# Altium PCB Base.PcbDoc
Units mm, origin at the board's own origin, x right, y up, seen from the top; angles counter-clockwise.
Board outline 79.4 x 68 mm, 4 copper layers (Top Layer, Plane 1, Plane 2, Bottom Layer), stack 1.579 mm thick; 69 components, 49 nets, 246 pads, 29 vias.
Unrouted connection lines stored in the file: 49.
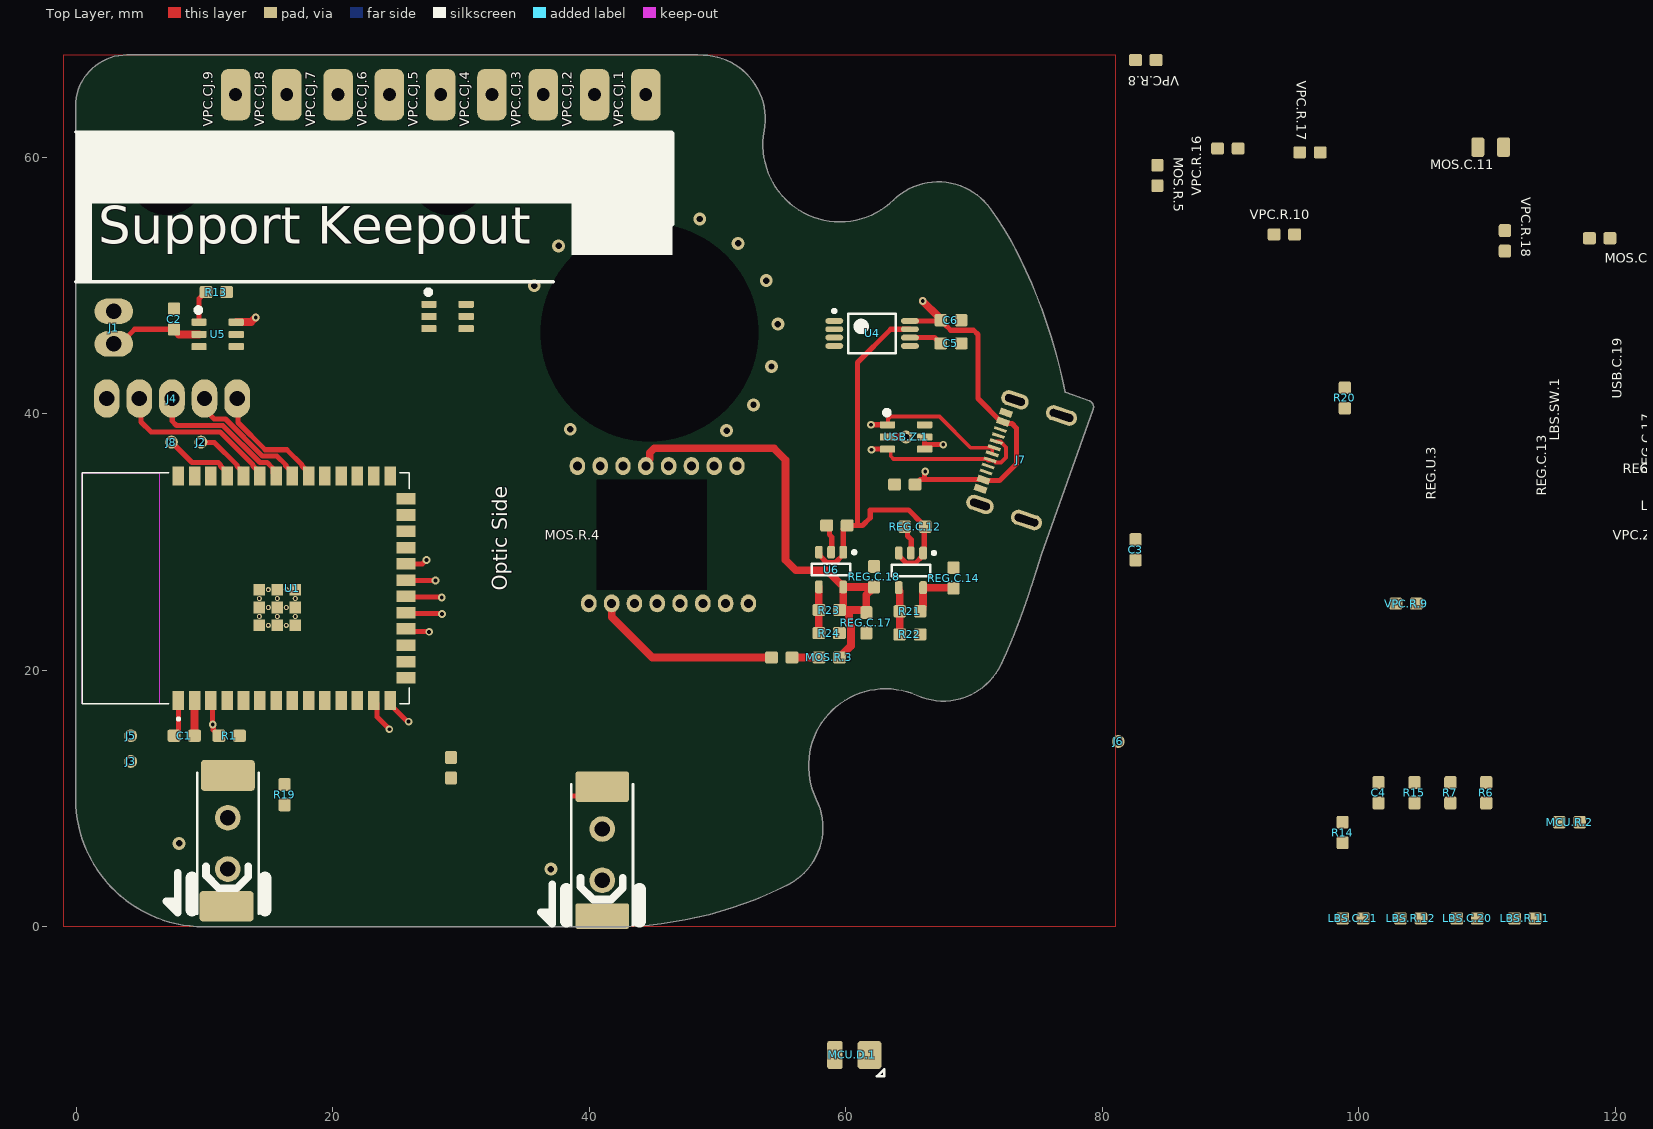
[diagram p0: Top Layer view]
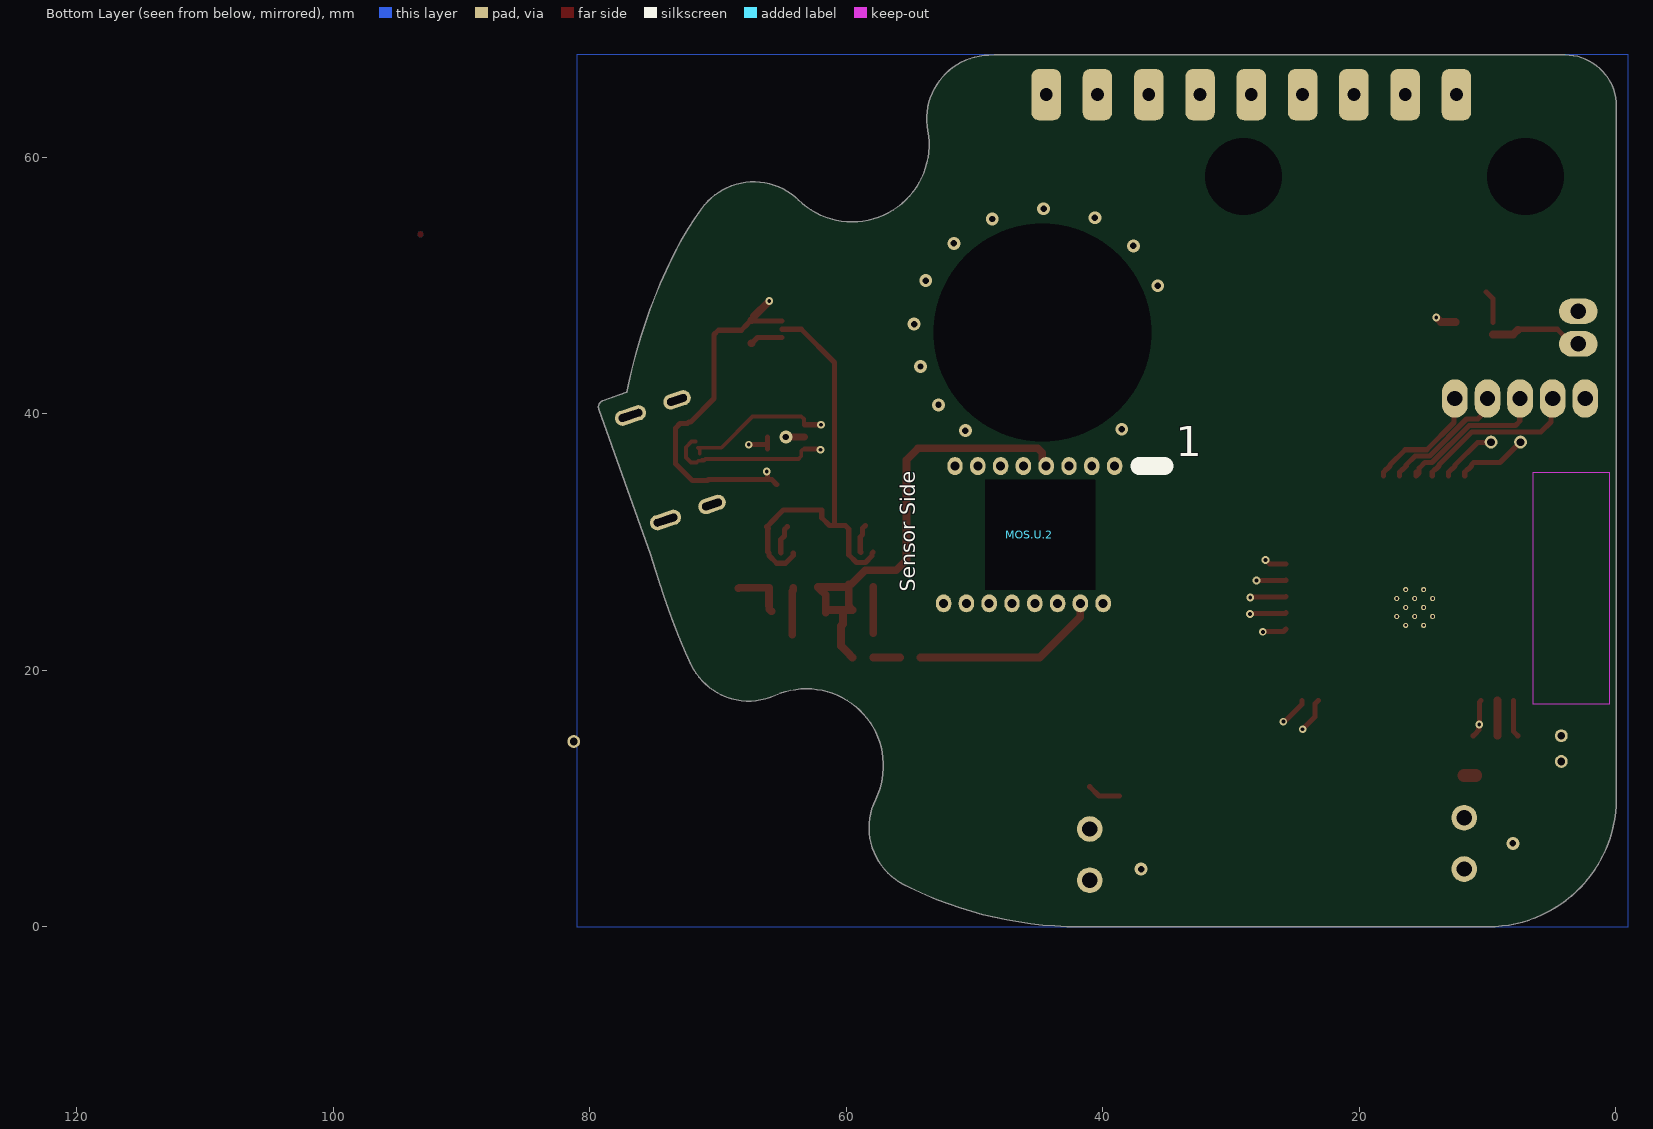
[diagram p1: Bottom Layer view, seen from below]
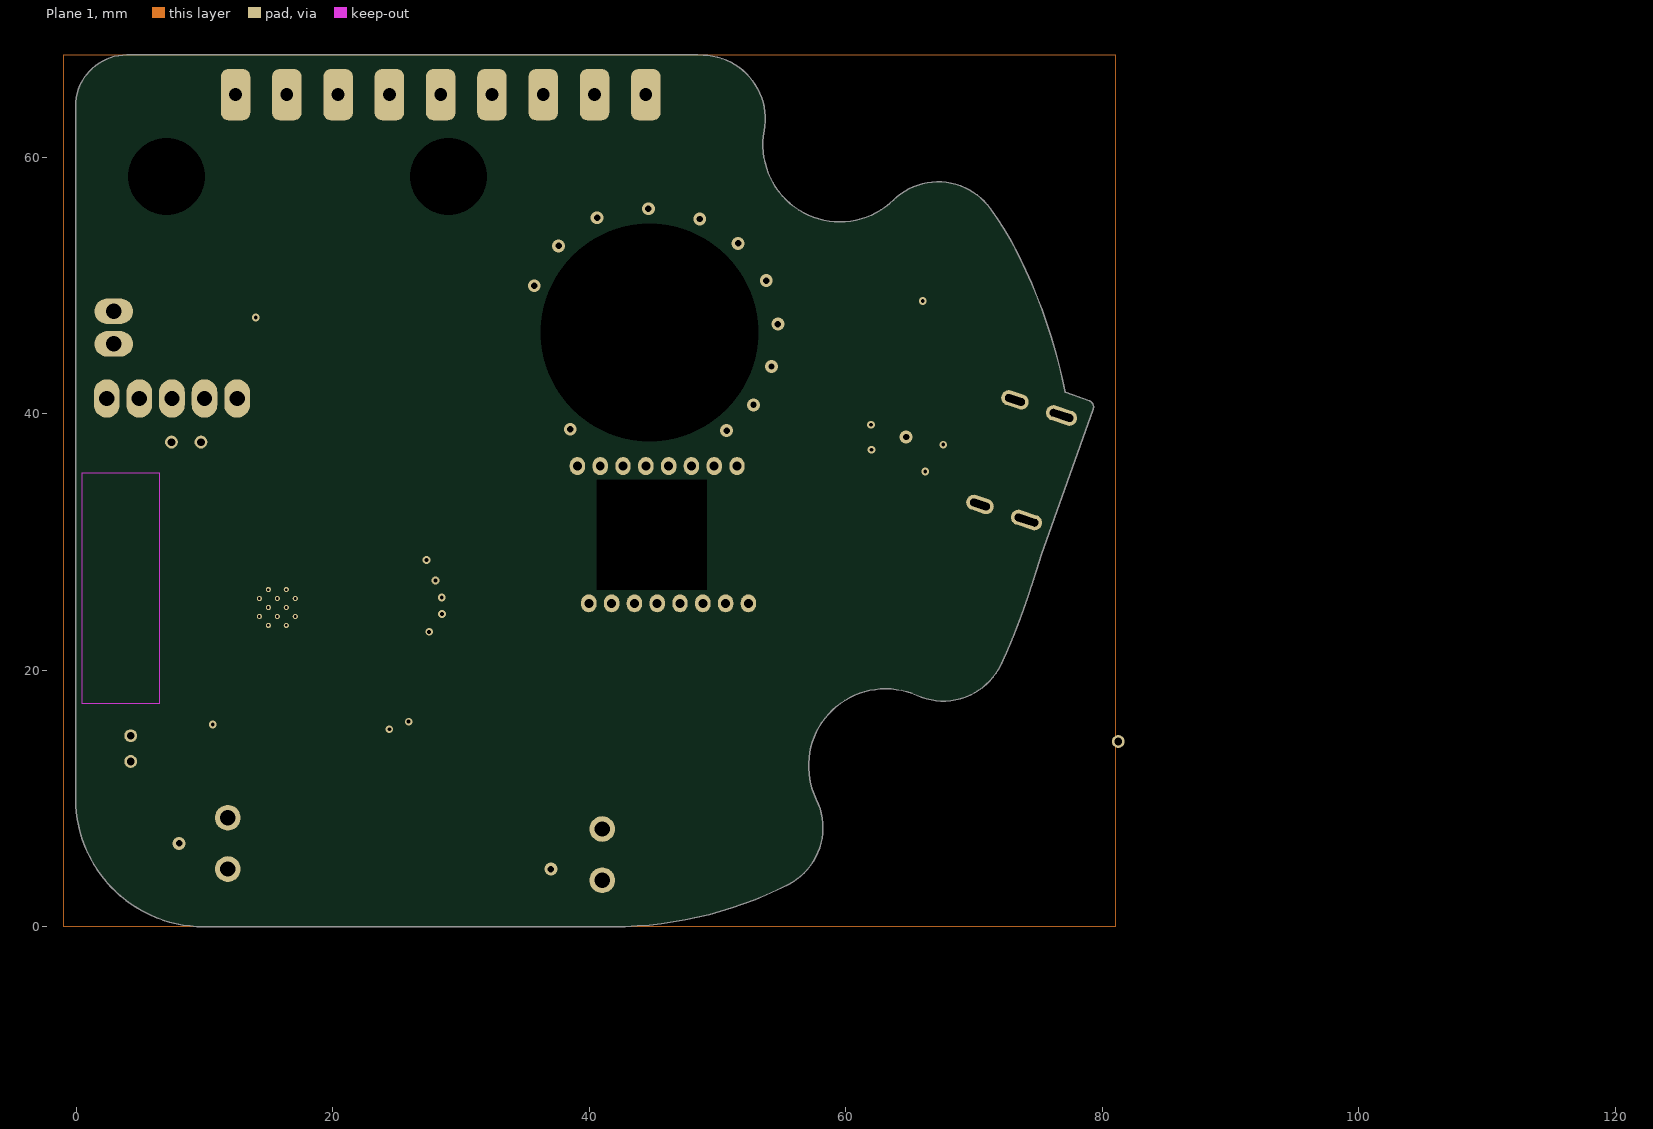
[diagram p2: Plane 1]
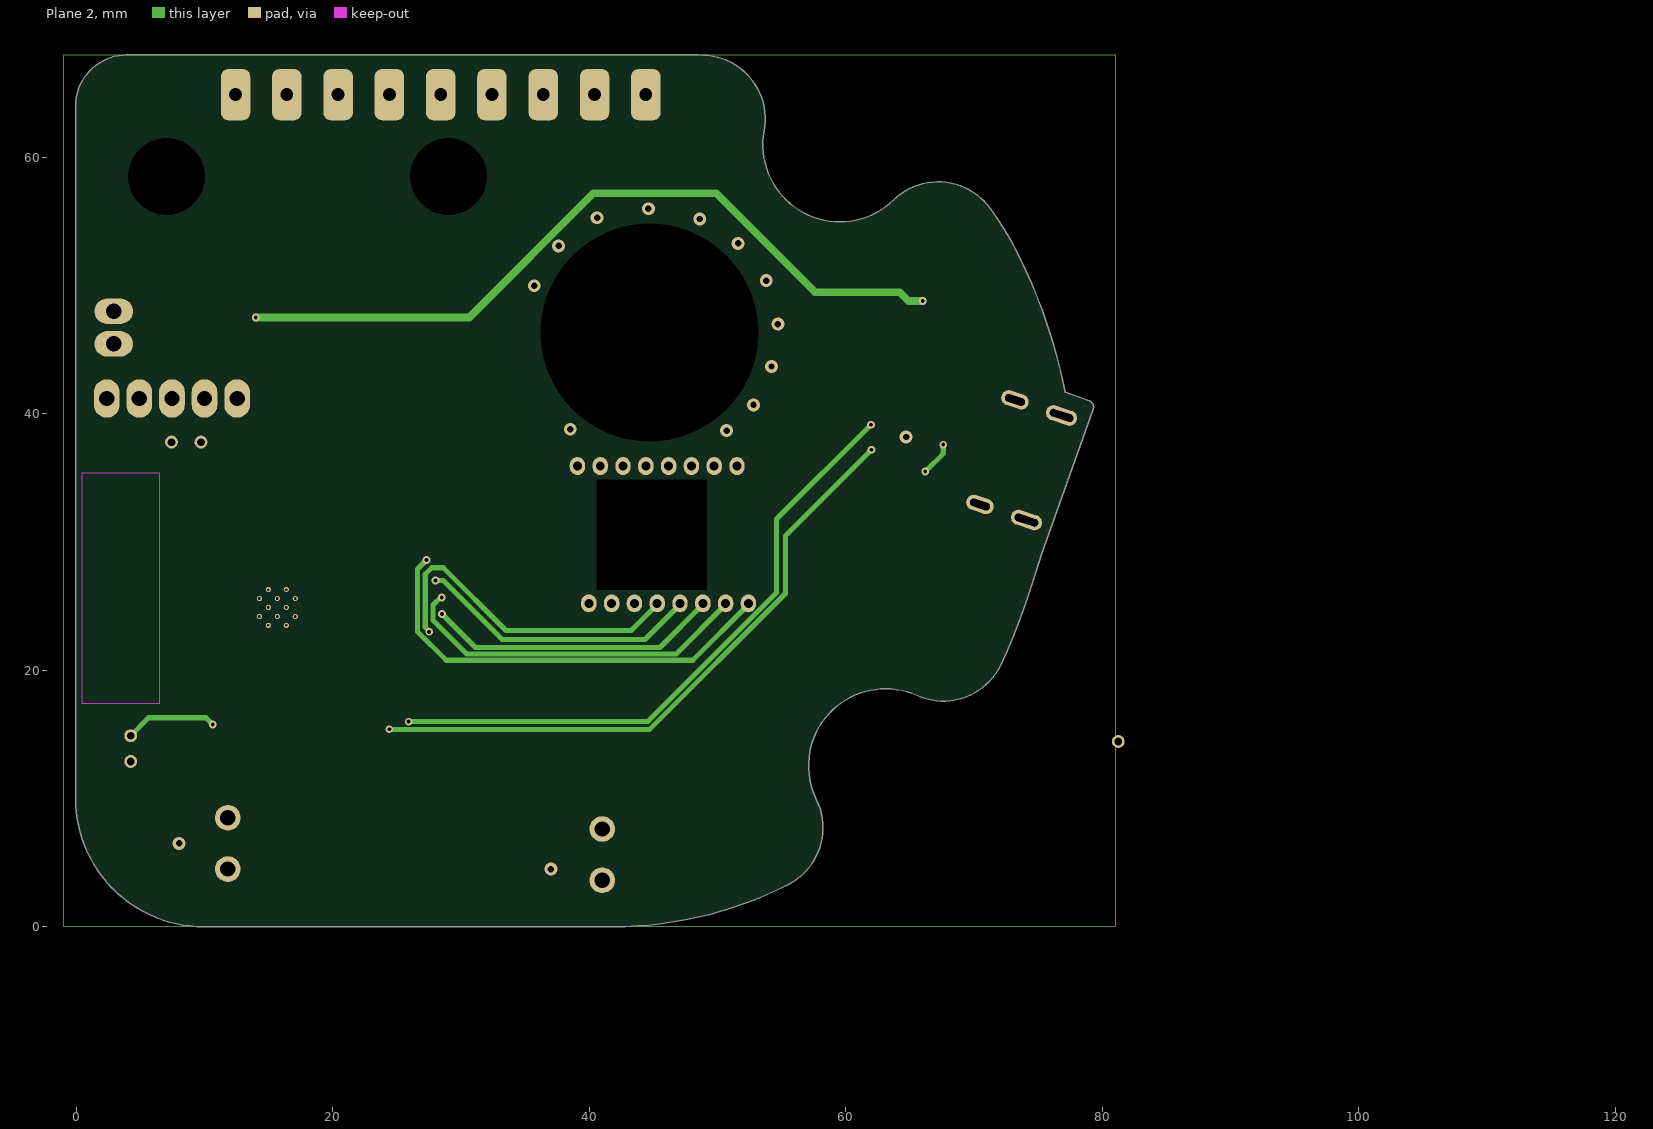
[diagram p3: Plane 2]

## Layer stack, top to bottom
Top Mask: solder mask 0.01, Solder Resist, Dk 3.5
Top Layer: signal copper 0.0356
Dielectric 1: prepreg 0.127, FR-4, Dk 4.2
Plane 1: signal copper 0.036
Dielectric 4: core 1.182, Dk 4.2
Plane 2: signal copper 0.036
Dielectric 2: prepreg 0.127, Dk 4.2
Bottom Layer: signal copper 0.0356
Bottom Solder: solder mask 0.01, Solder Resist, Dk 3.5

## Board outline
364 vertices, not listed, extent -0.073,0 79.324,68

## Design rules (kind name [scope] priority, off if disabled: settings)
BoardOutlineClearance [(Not HasFootprint('SPARKGAP'))] p1: gap=0.4 ignorepadtopadclearanceinfootprint=FALSE
Clearance [All] p1: gap=0.102 ignorepadtopadclearanceinfootprint=FALSE except(0.127: Arc-Via Track-Via SMDPad-Via THPad-Via Via-Via Via-Fill Via-Poly Via-Region Via-Text; 0.25: Arc-Hole Track-Hole SMDPad-Hole THPad-Hole Via-Hole Fill-Hole Poly-Hole Region-Hole Text-Hole)
ComponentClearance "Terminal Block" [(HasFootprint('Phoenix 1933189 - Header')) vs (HasFootprint('Phoenix 1933189 - Header'))] p1 off: gap=-2.286 collisioncheckmode=3 verticalgap=0.254 showdistances=FALSE
ComponentClearance "FET/TP self Clearance" [(Name like 'Q*') Or (Name like 'TP*') vs (Name like 'Q*') Or (Name like 'TP*')] p2 off: gap=0.254 collisioncheckmode=3 verticalgap=0.254 showdistances=FALSE
ComponentClearance [Not ((Name like 'H*') Or (Name like 'FID*') Or (Name like 'SP*')) vs Not ((Name like 'H*') Or (Name like 'FID*') Or (Name like 'SP*'))] p3 off: gap=0.5 collisioncheckmode=3 verticalgap=0.5 showdistances=FALSE
DiffPairsRouting [All] p1: maxlimit=0.102 minlimit=0.102 mostfreqgap=0.102 toplayer_minwidth=0.102 toplayer_maxwidth=1816.048 toplayer_prefwidth=0.102 midlayer2_minwidth=0.102 midlayer2_maxwidth=1816.048 midlayer2_prefwidth=0.102 midlayer3_minwidth=0.102 midlayer3_maxwidth=1816.048 midlayer3_prefwidth=0.102 bottomlayer_minwidth=0.102 bottomlayer_maxwidth=1816.048 bottomlayer_prefwidth=0.102 maxuncoupledlength=12.7
Height [All] p1 off: minheight=0 maxheight=41 prefheight=12.7
HoleSize [All] p1: absolutevalues=TRUE maxlimit=100 minlimit=0.3 maxpercent=80.000 minpercent=20.000
HoleToHoleClearance [All] p1: gap=0.6 allowstackedmicrovias=TRUE
LayerPairs [All] p1: enforce=FALSE
MinimumSolderMaskSliver [All] p1: minsoldermaskwidth=0.09
NetAntennae [Not (HasFootprint('BALANCE_RESISTOR'))] p1: netantennaetolerance=0
PasteMaskExpansion [All] p1: expansion=-0.025
PlaneClearance [All] p1: clearance=0.3
PlaneConnect [All] p1: pad.planeconnectstyle=Relief pad.reliefexpansion=0.5 pad.reliefentries=4 pad.reliefconductorwidth=0.5 pad.reliefairgap=0.25 via.planeconnectstyle=Direct via.reliefexpansion=0.5 via.reliefentries=4 via.reliefconductorwidth=0.5 via.reliefairgap=0.25
PolygonConnect "PolygonConnect Spark Gap" [HasFootprint('SparkGap')] p1: connectstyle=Direct reliefconductorwidth=0.254 reliefentries=4 polygonreliefangle="90 Angle" airgapwidth=0.254 // This rule makes it so spark gaps get direct connections to ground planes.
PolygonConnect PolygonConnect_GND [All vs InNet('GND')] p2: thpad.connectstyle=Relief thpad.reliefconductorwidth=0.5 thpad.reliefentries=4 thpad.polygonreliefangle="90 Angle" thpad.airgapwidth=0.25 smdpad.connectstyle=Relief smdpad.reliefconductorwidth=0.5 smdpad.reliefentries=4 smdpad.polygonreliefangle="90 Angle" smdpad.airgapwidth=0.25 via.connectstyle=Direct via.reliefconductorwidth=0.5 via.reliefentries=4 via.polygonreliefangle="90 Angle" via.airgapwidth=0.25 // This rule specifies all vias and holes connected to a GND plane have direct connections.
PolygonConnect [All] p3: thpad.connectstyle=Relief thpad.reliefconductorwidth=0.5 thpad.reliefentries=4 thpad.polygonreliefangle="90 Angle" thpad.airgapwidth=0.25 smdpad.connectstyle=Relief smdpad.reliefconductorwidth=0.5 smdpad.reliefentries=4 smdpad.polygonreliefangle="90 Angle" smdpad.airgapwidth=0.25 via.connectstyle=Direct via.reliefconductorwidth=0.5 via.reliefentries=4 via.polygonreliefangle="90 Angle" via.airgapwidth=0.25
RoutingVias [All] p1: holewidth=0.3 width=0.6 viastyle="Through Hole" minholewidth=0.3 minwidth=0.6 maxholewidth=6.3 maxwidth=6.55
SilkToBoardRegionClearance [All] p1 off:
SilkToSilkClearance [All] p1 off: silktosilkclearance=0.254
SilkToSolderMaskClearance SilkscreenOverComponentPads [IsPad] p1: minsilkscreentomaskgap=0.102 clearancetoexposedcopper=FALSE
SolderMaskExpansion [All] p1: expansion=0.076 istentingtop=FALSE
Width [All] p1: maxlimit=1816.048 minlimit=0.102 preferedwidth=0.4
16 further rules are at their usual default settings.

## Classes and differential pairs
component class VPC: VPC.CJ.1 VPC.CJ.2 VPC.CJ.3 VPC.CJ.4 VPC.CJ.5 VPC.CJ.6 VPC.CJ.7 VPC.CJ.8 VPC.CJ.9 VPC.R.8 VPC.R.9 VPC.R.10 VPC.R.16 VPC.R.17 VPC.R.18 VPC.Z.2
component class USB: J7 USB.C.19 USB.Z.1
component class REG: C5 C6 R20 R21 R22 R23 R24 REG.C.12 REG.C.13 REG.C.14 REG.C.16 REG.C.17 REG.C.18 REG.U.3 U4 U6
component class MOS: MOS.C.10 MOS.C.11 MOS.R.3 MOS.R.4 MOS.R.5 MOS.U.2
component class MCU: C1 C2 C3 C4 J1 J2 J3 J4 J5 J6 J8 MCU.D.1 MCU.R.2 R1 R6 R7 R13 R14 R15 R19 U1 U5
component class LBS: LBS.C.20 LBS.C.21 LBS.R.11 LBS.R.12 LBS.SW.1 LBS.SW.2

## Components (designator, comment, footprint, x,y, rotation, side; value= is the part's Value field where it differs from the comment)
C1 "0805" 0603 8.4,14.9 r270 top value="10uF 25V"
C2 "0805" 0603 7.6,47.4 r180 top value="1uF 25V"
C3 "0805" 0603 82.6,29.4 r0 top value="1uF 25V"
C4 "0805" 0603 101.549,10.45 r0 top value="1uF 25V"
C5 "0805" 0603 68.2,45.5 r90 top value="1uF 25V"
C6 "0805" 0603 68.2,47.304 r90 top value="1uF 25V"
J1 "2pin" 2pin 2.9,46.603 r180 top
J2 "TestPoint" TestPoint 9.7,37.8 r90 top
J3 "TestPoint" TestPoint 4.22,12.895 r90 top
J4 "5pin" 5pin 8.71,41.2 r270 top
J5 "TestPoint" TestPoint 4.22,14.9 r90 top
J6 "TestPoint" TestPoint 81.249,14.45 r90 top
J7 "UBC-RA-TF (HF)" UBC-RA-TF 74.2,36.3 r71.5 top
J8 "TestPoint" TestPoint 7.4,37.8 r90 top
LBS.C.20 "0805" 0603 108.449,0.65 r90 top value="0.01uF 100V" (schematic designator C20)
LBS.C.21 "0805" 0603 99.549,0.65 r90 top value="0.01uF 100V" (schematic designator C21)
LBS.R.11 "0805" 0603 112.949,0.65 r90 top value="1k 1%" (schematic designator R11)
LBS.R.12 "0805" 0603 104.049,0.65 r90 top value="1k 1%" (schematic designator R12)
LBS.SW.1 "D2LS-21" D2LS-21#1 41,5.624 r90 top (schematic designator SW1)
LBS.SW.2 "D2LS-21" D2LS-21#2 11.8,6.5 r90 top (schematic designator SW2)
MCU.D.1 "SPMWH1228" SPMWH1228 60.7,-10 r0 top (schematic designator D1)
MCU.R.2 "0805" 0603 116.449,8.15 r90 top value="1k 1%" (schematic designator R2)
MOS.C.10 "0805" 0603 118.8,53.7 r90 top value="10uF 25V" (schematic designator C10)
MOS.C.11 "0805" 0805 110.3,60.8 r90 top value="0.1uF 100V" (schematic designator C11)
MOS.R.3 "0805" 0603 58.7,21 r270 top value="22R 1%" (schematic designator R3)
MOS.R.4 "0805" 0603 55,21 r270 top value="22R 1%" (schematic designator R4)
MOS.R.5 "0805" 0603 84.3,58.6 r180 top value="10k 1%" (schematic designator R5)
MOS.U.2 "PMW3360DM-T2QU" PMW3360DM-T2QU 39.067,35.925 r180 bottom locked (schematic designator U2)
R1 "0805" 0603 11.9,14.9 r270 top value="100k 1%"
R6 "0805" 0603 109.949,10.45 r0 top value="10k 1%"
R7 "0805" 0603 107.149,10.45 r0 top value="10k 1%"
R13 "0805" 0603 10.9,49.504 r90 top value="10k 1%"
R14 "0805" 0603 98.749,7.35 r0 top value="1k 1%"
R15 "0805" 0603 104.349,10.45 r0 top value="10k 1%"
R19 "0805" 0603 16.229,10.3 r180 top value="10k 1%"
R20 "0805" 0603 98.919,41.244 r0 top value="1k 1%"
R21 "0805" 0603 65,24.604 r270 top value="1k 1%"
R22 "0805" 0603 65,22.8 r90 top value="1k 1%"
R23 "0805" 0603 58.7,24.704 r270 top value="1k 1%"
R24 "0805" 0603 58.7,22.9 r90 top value="1k 1%"
REG.C.12 "0805" 0603 65.4,31.2 r270 top value="1uF 25V" (schematic designator C12)
REG.C.13 "0805" 0603 29.2,12.4 r180 top value="10uF 25V" (schematic designator C13)
REG.C.14 "0805" 0603 68.4,27.2 r180 top value="1uF 25V" (schematic designator C14)
REG.C.16 "0805" 0603 59.3,31.3 r270 top value="1uF 25V" (schematic designator C16)
REG.C.17 "0805" 0603 61.6,23.7 r0 top value="10uF 25V" (schematic designator C17)
REG.C.18 "0805" 0603 62.2,27.3 r180 top value="1uF 25V" (schematic designator C18)
REG.U.3 "AP2202K-ADJTRG1" "AP2202 - SOT95P270X145-5N" 65.075,27.8 r270 top (schematic designator U3)
U1 "ESP32-S3-WROOM-1-N8R8" XCVR_ESP32S3WROOM1N8R8 13.2,26.4 r90 top
U4 "TPS2115ADRBR" TSSOP-8 62.05,46.275 r0 top
U5 "BQ21040DBVT" "PESD3V3S4UD - SOT95P275X110-6N" 11,46.2 r0 top
U6 "AP2202K-ADJTRG1" "AP2202 - SOT95P270X145-5N" 58.85,27.859 r270 top
USB.C.19 "0805" 0603 64.6,34.5 r270 top value="10uF 25V" (schematic designator C19)
USB.Z.1 "IP4220CZ6,125" "PESD3V3S4UD - SOT95P275X110-6N" 64.7,38.2 r0 top (schematic designator Z1)
VPC.CJ.1 "PCBJointCastellationJoint" PCBJoint 44.4,64.9 r0 top (schematic designator CJ1)
VPC.CJ.2 "PCBJointCastellationJoint" PCBJoint 40.4,64.9 r0 top (schematic designator CJ2)
VPC.CJ.3 "PCBJointCastellationJoint" PCBJoint 36.4,64.9 r0 top (schematic designator CJ3)
VPC.CJ.4 "PCBJointCastellationJoint" PCBJoint 32.4,64.9 r0 top (schematic designator CJ4)
VPC.CJ.5 "PCBJointCastellationJoint" PCBJoint 28.4,64.9 r0 top (schematic designator CJ5)
VPC.CJ.6 "PCBJointCastellationJoint" PCBJoint 24.4,64.9 r0 top (schematic designator CJ6)
VPC.CJ.7 "PCBJointCastellationJoint" PCBJoint 20.4,64.9 r0 top (schematic designator CJ7)
VPC.CJ.8 "PCBJointCastellationJoint" PCBJoint 16.4,64.9 r0 top (schematic designator CJ8)
VPC.CJ.9 "PCBJointCastellationJoint" PCBJoint 12.4,64.9 r0 top (schematic designator CJ9)
VPC.R.8 "0805" 0603 83.4,67.6 r270 top value="10k 1%" (schematic designator R8)
VPC.R.9 "0805" 0603 103.7,25.2 r90 top value="10k 1%" (schematic designator R9)
VPC.R.10 "0805" 0603 94.2,54 r90 top value="10k 1%" (schematic designator R10)
VPC.R.16 "0805" 0603 89.8,60.7 r270 top value="1k 1%" (schematic designator R16)
VPC.R.17 "0805" 0603 96.2,60.4 r270 top value="1k 1%" (schematic designator R17)
VPC.R.18 "0805" 0603 111.4,53.5 r0 top value="1k 1%" (schematic designator R18)
VPC.Z.2 "IP4220CZ6,125" "PESD3V3S4UD - SOT95P275X110-6N" 28.935,47.6 r0 top (schematic designator Z2)

## Footprints (in the part's own frame and the unit in brackets; to place one, negate y for a bottom-side part, rotate by r counter-clockwise, add the part's x,y. Pads: shape width x height; smd on the part's side, far side on the other; paste and mask are expansions set on the pad)
2pin [mm]
  oval 3x2 hole 1.2: 1(0,1.143) 2(0,-1.397)
5pin [mm]
  oval 3x2 hole 1.2: 1(0,3.81) 2(0,1.27) 3(0,-1.27) 4(0,-3.81) 5(0,-6.35)
0603 [mm] "Chip Capacitor, 2-Leads, Body 1.6x0.8mm, IPC Medium Density"
  rrect30% 0.95x1 smd paste-2.515: 1(0,-0.8) 2(0,0.8)
  body extent -0.48,-0.88 0.48,0.87, height 0.65
0805 [mm] "Chip Capacitor, 2-Leads, Body 2.0x1.3mm, IPC Medium Density"
  rrect30% 1.5x1 smd paste-2.515: 1(0,1.002) 2(0,-1.002)
  body extent -0.72,-1.1 0.72,1.1, height 0.8
"AP2202 - SOT95P270X145-5N" [mm] "SOT23, 5-Leads, Body 2.92x2.70mm, Pitch 0.95mm, IPC Medium Density"
  rrect50% 1x0.6 smd paste-0.025: 1(-1.35,0.95) 2(-1.35,0) 3(-1.35,-0.95) 4(1.35,-0.95) 5(1.35,0.95)
  silkscreen extent -1.47,-1.5 0.45,1.93, body extent -0.85,-1.52 0.85,1.52, height 1.45
D2LS-21#1 [mm]
  rrect20% 2x4.2 smd paste-0.03: A(-4.8,0)
  rrect20% 2.4x4.2 smd paste-0.03: B(5.3,0)
  round 2 hole 1.2: ""(-2,0) ""(2,0)
  silkscreen extent -5.5,-2.9 5.5,4.8, body extent -5.6,-2.4 5.6,2.4, height 3.19
D2LS-21#2 [mm]
  rrect20% 2.35x4.2 smd paste-0.03: A(-4.9,0.1)
  rrect20% 2.4x4.2 smd paste-0.03: B(5.3,0)
  round 2 hole 1.2: ""(-2,0) ""(2,0)
  silkscreen extent -5.5,-2.9 5.5,4.8, body extent -5.6,-2.4 5.6,2.4, height 3.19
PCBJoint [mm]
  rrect50% 2.3x4 hole 1 paste-99: 1(0,0)
"PESD3V3S4UD - SOT95P275X110-6N" [mm] "SOT23, 6-Leads, Body 2.90x2.75mm, Pitch 0.95mm, IPC Medium Density"
  rrect30% 1.2x0.55 smd paste-0.026 mask+0.085: 1(-1.45,0.95) 2(-1.45,0) 3(-1.45,-0.95) 4(1.45,-0.95) 5(1.45,0) 6(1.45,0.95)
  silkscreen extent -1.62,1.78 -1.37,2.02, body extent -0.85,-1.55 0.85,1.55, height 1.1
PMW3360DM-T2QU [mm]
  oval 1.2x1.4 hole 0.7: 1(0,0) 2(-1.778,0) 3(-3.556,0) 4(-5.334,0) 5(-7.112,0) 6(-8.89,0) 7(-10.668,0) 8(-12.446,0) 9(-13.335,-10.7) 10(-11.557,-10.7) 11(-9.779,-10.7) 12(-8.001,-10.7) 13(-6.223,-10.7) 14(-4.445,-10.7) 15(-2.667,-10.7) 16(-0.889,-10.7)
  rect 0x0 hole 8.6 square unplated: ""(-5.8,-5.35)
  silkscreen extent 1.92,0 3.9,0, body extent -16.06,-14.76 5.09,4.09, height 2.44
SPMWH1228 [mm]
  rrect30% 1.2x2.2 smd paste-0.05 mask+0.02: 1(-1.55,0)
  rrect30% 1.9x2.2 smd paste-0.05 mask+0.02: 2(1.15,0)
  silkscreen extent 1.72,-1.67 2.3,-1.1, body extent -1.75,-1.4 1.75,1.4, height 0.65
TestPoint [mm]
  round 1 hole 0.6: 1(0,0)
TSSOP-8 [mm]
  oval 1.4x0.45 smd: 1(-2.95,0.975) 2(-2.95,0.325) 3(-2.95,-0.325) 4(-2.95,-0.975) 5(2.95,-0.975) 6(2.95,-0.325) 7(2.95,0.325) 8(2.95,0.975)
  silkscreen extent -3.07,-1.55 1.85,1.87, body extent -3.2,-1.55 3.2,1.55, height 1.2
UBC-RA-TF [mm]
  rect 0.52x1 smd: 1(-3.2,2.825) 2(-2.45,2.825) 11(2.3,2.825) 12(3.05,2.825)
  rect 0.27x1 smd: 3(-1.825,2.825) 4(-1.325,2.825) 5(-0.825,2.825) 6(-0.325,2.825) 7(0.175,2.825) 8(0.675,2.825) 9(1.175,2.825) 10(1.675,2.825)
  oval 1.2x2.2 hole 0.6 slot 1.6 at 90 deg: 19(-4.375,2.475) 19(4.225,2.475)
  oval 1.2x2.5 hole 0.6 slot 1.9 at 90 deg: 19(-4.375,-1.35) 19(4.225,-1.35)
  body extent -4.5,-4.63 4.45,3.28, height 3.61
XCVR_ESP32S3WROOM1N8R8 [mm]
  rect 1.5x0.9 smd: 1(-8.75,5.26) 2(-8.75,3.99) 3(-8.75,2.72) 4(-8.75,1.45) 5(-8.75,0.18) 6(-8.75,-1.09) 7(-8.75,-2.36) 8(-8.75,-3.63) 9(-8.75,-4.9) 10(-8.75,-6.17) 11(-8.75,-7.44) 12(-8.75,-8.71) 13(-8.75,-9.98) 14(-8.75,-11.25) 27(8.75,-11.25) 28(8.75,-9.98) 29(8.75,-8.71) 30(8.75,-7.44) 31(8.75,-6.17) 32(8.75,-4.9) 33(8.75,-3.63) 34(8.75,-2.36) 35(8.75,-1.09) 36(8.75,0.18) 37(8.75,1.45) 38(8.75,2.72) 39(8.75,3.99) 40(8.75,5.26)
  rect 0.9x1.5 smd: 15(-6.985,-12.5) 16(-5.715,-12.5) 17(-4.445,-12.5) 18(-3.175,-12.5) 19(-1.905,-12.5) 20(-0.635,-12.5) 21(0.635,-12.5) 22(1.905,-12.5) 23(3.175,-12.5) 24(4.445,-12.5) 25(5.715,-12.5) 26(6.985,-12.5)
  rect 0.9x0.9 smd: 41_1(-1.5,-2.46) 41_2(-2.9,-2.46) 41_3(-0.1,-2.46) 41_4(-2.9,-3.86) 41_5(-1.5,-3.86) 41_6(-0.1,-3.86) 41_7(-2.9,-1.06) 41_8(-1.5,-1.06) 41_9(-0.1,-1.06)
  round 0.4 hole 0.2 mask+0: 41_10(-1.5,-1.76) 41_11(-2.9,-1.76) 41_12(-0.1,-1.76) 41_13(-2.9,-3.16) 41_14(-1.5,-3.16) 41_15(-0.1,-3.16) 41_16(-2.2,-1.06) 41_17(-0.8,-1.06) 41_18(-2.2,-2.46) 41_19(-0.8,-2.46) 41_20(-2.2,-3.86) 41_21(-0.8,-3.86)
  Keep-Out Layer region: 9,6.75 -9,6.75 -9,12.75 9,12.75
  Keep-Out Layer region: 9,6.75 -9,6.75 -9,12.75 9,12.75
  silkscreen extent -10.3,-12.75 9,12.75, body extent -9,-12.75 9,12.75, height 3.25

## Part data
C1 MOS.C.10 REG.C.13 REG.C.17 USB.C.19: library part "Cap 10uF 25V", "0805, X5R or better", Supplier Part Number 1=81-GRM21BR61E106KA3L, PNP-A=0, PNP-da=0, PNP-dx=0, PNP-dy=0, PNP-FeedType=Tape, PNP-Level=1, PNP-Lv=1, PNP-Nzl=2, PNP-PlacePriority=1, PNP-Pt=0, PNP-TapeIndex=1, PNP-TapeWidth=8, PNP-Thk=1.25, PNP-TS=70, PNP-Type=chi, PNP-Voff=0, PNP-W=0, PNP-X=2.00, PNP-Y=1.25, Supplier 1=Mouser, Supplier 2=Digi-Key, Supplier Part Number 2=490-5523-1-ND
C2 C3 C4 C5 C6 REG.C.12 REG.C.14 REG.C.16 REG.C.18: library part "Cap 1uF 25V", "0805, X5R or better", Supplier Part Number 1=1276-1066-2-ND, PNP-A=0, PNP-da=0, PNP-dx=0, PNP-dy=0, PNP-FeedType=Tape, PNP-Level=1, PNP-Lv=1, PNP-Nzl=2, PNP-PlacePriority=1, PNP-Pt=0, PNP-TapeIndex=1, PNP-TapeWidth=8, PNP-Thk=1.25, PNP-TS=70, PNP-Type=chi, PNP-Voff=0, PNP-W=0, PNP-X=2.00, PNP-Y=1.25, Supplier 1=Digi-Key, Supplier 2=Digi-Key, Supplier Part Number 2=1276-1066-1-ND
LBS.C.20 LBS.C.21: library part "Cap 0.01uF 100V", "0805, X5R or better", Supplier Part Number 1=1276-6845-2-ND, PNP-A=0, PNP-da=0, PNP-dx=0, PNP-dy=0, PNP-FeedType=Tape, PNP-Level=1, PNP-Lv=1, PNP-Nzl=2, PNP-PlacePriority=1, PNP-Pt=0, PNP-TapeIndex=1, PNP-TapeWidth=8, PNP-Thk=0.85, PNP-TS=70, PNP-Type=chi, PNP-Voff=0, PNP-W=0, PNP-X=2.00, PNP-Y=1.25, Supplier 1=Digi-Key, Supplier 2=Arrow, Supplier Part Number 2=HFLC7Kmwq4-6R2SVzaQAUvCwxvZH1YjWdj_EBba1ByE
LBS.R.11 LBS.R.12 MCU.R.2 R14 R20 R21 R22 R23 R24 VPC.R.16 VPC.R.17 VPC.R.18: library part "Res 1k 1% 0805", "Chip resistor, 1/8W 100PPM", Supplier Part Number 1=RMCF0805FT1K00TR-ND, PNP-A=0, PNP-da=0, PNP-dx=0, PNP-dy=0, PNP-FeedType=Tape, PNP-Level=1, PNP-Lv=1, PNP-Nzl=2, PNP-PlacePriority=1, PNP-Pt=0, PNP-TapeIndex=1, PNP-TapeWidth=8, PNP-Thk=0.55, PNP-TS=70, PNP-Type=chi, PNP-Voff=0, PNP-W=0, PNP-X=2.00, PNP-Y=1.25, Supplier 1=Digi-Key
LBS.SW.1 LBS.SW.2: "Compact Surface-mounting Switch for long durability", Supplier Part Number 1=Z4378CT-ND, Supplier 1=Digi-Key, Supplier 2=Mouser, Supplier Part Number 2=653-D2LS-21
MCU.D.1: "3V/0.5W white LED, 2.8mm x 3.5mm", PNP-A=90, PNP-da=550, PNP-dx=0, PNP-dy=0, PNP-FeedType=Tape, PNP-Level=1, PNP-Lv=1, PNP-Nzl=3, PNP-PlacePriority=2, PNP-Pt=0, PNP-TapeIndex=1, PNP-TapeWidth=8, PNP-Thk=0.65, PNP-TS=70, PNP-Type=chi, PNP-Voff=0, PNP-W=0, PNP-X=2.8, PNP-Y=3.2, Supplier 1=Arrow, Supplier 2=Digi-Key, Supplier 3=Digi-Key, Supplier Part Number 2=1510-1428-1-ND, Supplier Part Number 3=1510-1429-1-ND
MOS.C.11: library part "Cap 0.1uF 100V", "0805, X5R or better", Supplier Part Number 1=1276-6840-2-ND, PNP-A=0, PNP-da=0, PNP-dx=0, PNP-dy=0, PNP-FeedType=Tape, PNP-Level=1, PNP-Lv=1, PNP-Nzl=2, PNP-PlacePriority=1, PNP-Pt=0, PNP-TapeIndex=1, PNP-TapeWidth=8, PNP-Thk=1.05, PNP-TS=70, PNP-Type=chi, PNP-Voff=0, PNP-W=0, PNP-X=2.00, PNP-Y=1.25, Supplier 1=Digi-Key
MOS.R.3 MOS.R.4: library part "Res 22R 1% 0805", "Chip resistor", Supplier Part Number 1=RMCF0805FT22R0CT-ND, PNP-A=0, PNP-da=0, PNP-dx=0, PNP-dy=0, PNP-FeedType=Tape, PNP-Level=1, PNP-Lv=1, PNP-Nzl=2, PNP-PlacePriority=1, PNP-Pt=0, PNP-TapeIndex=1, PNP-TapeWidth=8, PNP-Thk=0.55, PNP-TS=70, PNP-Type=chi, PNP-Voff=0, PNP-W=0, PNP-X=2.00, PNP-Y=1.25, Supplier 1=Digi-Key, Supplier 2=Arrow, Supplier Part Number 2=RMCF0805FT22R0
MOS.R.5 R6 R7 R13 R15 R19 VPC.R.8 VPC.R.9 VPC.R.10: library part "Res 10k 1% 0805", "Chip resistor", Supplier Part Number 1=RMCF0805FT10K0TR-ND, PNP-A=0, PNP-da=0, PNP-dx=0, PNP-dy=0, PNP-FeedType=Tape, PNP-Level=1, PNP-Lv=1, PNP-Nzl=2, PNP-PlacePriority=1, PNP-Pt=0, PNP-TapeIndex=1, PNP-TapeWidth=8, PNP-Thk=0.55, PNP-TS=70, PNP-Type=chi, PNP-Voff=0, PNP-W=0, PNP-X=2.00, PNP-Y=1.25, Supplier 1=Digi-Key
MOS.U.2: "Optical Gaming Navigation Sensor", PNP-A=0, PNP-da=0, PNP-dx=0, PNP-dy=0, PNP-FeedType=Tape, PNP-Level=1.3, PNP-Lv=26, PNP-Nzl=4, PNP-PlacePriority=3, PNP-Pt=0, PNP-TapeIndex=2, PNP-TapeWidth=12, PNP-Thk=1.45, PNP-TS=70, PNP-Type=QFP, PNP-Voff=0, PNP-W=0.1, PNP-X=4.9, PNP-Y=3.9
R1: library part "Res 100k 1% 0805", "Chip resistor", Supplier Part Number 1=RMCF0805FT100KTR-ND, PNP-A=0, PNP-da=0, PNP-dx=0, PNP-dy=0, PNP-FeedType=Tape, PNP-Level=1, PNP-Lv=1, PNP-Nzl=2, PNP-PlacePriority=1, PNP-Pt=0, PNP-TapeIndex=1, PNP-TapeWidth=8, PNP-Thk=0.55, PNP-TS=70, PNP-Type=chi, PNP-Voff=0, PNP-W=0, PNP-X=2.00, PNP-Y=1.25, Supplier 1=Digi-Key, Supplier 2=Digi-Key, Supplier Part Number 2=RMCF0805FT100KCT-ND
REG.U.3 U6: library part AP2202K-3.3, "3.3V 150mA LDO regulator", Supplier Part Number 1=621-AP2202K-3.3TRG1, PNP-A=90, PNP-da=0, PNP-dx=0, PNP-dy=0, PNP-FeedType=Tape, PNP-Level=1, PNP-Lv=26, PNP-Nzl=2, PNP-PlacePriority=3, PNP-Pt=0, PNP-TapeIndex=1, PNP-TapeWidth=8, PNP-Thk=1, PNP-TS=90, PNP-Type=CHP, PNP-Voff=0, PNP-W=0, PNP-X=2.9, PNP-Y=1.3, Supplier 1=Mouser, Supplier 2=Digi-Key, Supplier 3=Arrow, Supplier Part Number 2=AP2202K-3.3TRG1DICT-ND, Supplier Part Number 3=PWagzdsTFFHKE_U17B45SP-NtndBrheJIaI5hB7gHD0ZVywxIBNyoAQstvnyfZZ0
U1: "Bluetooth, WiFi 802.11b/g/n, Bluetooth v5.0 Transceiver Module 2.4GHz PCB Trace Surface Mount", Package=None, Availability="In Stock", Check_prices=https://www.snapeda.com/parts/ESP32-S3-WROOM-1-N8R8/Espressif+Systems/view-part/?ref=eda, MF="Espressif Systems", MP=ESP32-S3-WROOM-1-N8R8, Price=None, Purchase-URL=https://pricing.snapeda.com/search?q=ESP32-S3-WROOM-1-N8R8&ref=eda, SnapEDA_Link=https://www.snapeda.com/parts/ESP32-S3-WROOM-1-N8R8/Espressif+Systems/view-part/?ref=snap
USB.Z.1: "TVS DIODE 5.5V 6TSOP (Low capacitance, USB)", PNP-A=270, PNP-da=0, PNP-dx=0, PNP-dy=0, PNP-FeedType=Tape, PNP-Level=1, PNP-Lv=26, PNP-Nzl=2, PNP-PlacePriority=3, PNP-Pt=0, PNP-TapeIndex=1, PNP-TapeWidth=8, PNP-Thk=1, PNP-TS=90, PNP-Type=CHP, PNP-Voff=0, PNP-W=0, PNP-X=2.9, PNP-Y=1.3
VPC.CJ.1 VPC.CJ.2 VPC.CJ.3 VPC.CJ.4 VPC.CJ.5 VPC.CJ.6 VPC.CJ.7 VPC.CJ.8 VPC.CJ.9: library part PCBJoint, "Pad for soldering a castellated PCB edge. Easy way to join two PCBs together.", PNP-A=0, PNP-da=0, PNP-dx=0, PNP-dy=0, PNP-FeedType=Tape, PNP-Level=1, PNP-Lv=1, PNP-Nzl=2, PNP-PlacePriority=1, PNP-Pt=0, PNP-TapeIndex=1, PNP-TapeWidth=8, PNP-Thk=1, PNP-TS=70, PNP-Type=CHI, PNP-Voff=0, PNP-W=0, PNP-X=1, PNP-Y=1
VPC.Z.2: "TVS DIODE 5.5V 6TSOP (Low capacitance, USB)", Supplier Part Number 1=1727-3578-1-ND, PNP-A=270, PNP-da=0, PNP-dx=0, PNP-dy=0, PNP-FeedType=Tape, PNP-Level=1, PNP-Lv=26, PNP-Nzl=2, PNP-PlacePriority=3, PNP-Pt=0, PNP-TapeIndex=1, PNP-TapeWidth=8, PNP-Thk=1, PNP-TS=90, PNP-Type=CHP, PNP-Voff=0, PNP-W=0, PNP-X=2.9, PNP-Y=1.3, Supplier 1=Digi-Key, Supplier 2=Mouser, Supplier 3=Arrow, Supplier Part Number 2=771-IP4220CZ6-T/R, Supplier Part Number 3=IP4220CZ6,125

## Free pads (board coordinates)
  round 0 hole 6: ""(7,58.5) ""(29,58.5)
  round 0 hole 17: ""(44.7,46.359)

## Via types
v1: diameter 1, hole 0.5, Top Layer to Bottom Layer, tented both sides, 15 vias
v2: diameter 0.6, hole 0.3, Top Layer to Bottom Layer, tented both sides, 14 vias

## Nets (pads, with @x,y where several pads share a name; then routed paths per layer and width w, separated by ;. In a path a pad name is that pad's centre, name@x,y a point inside that pad or via, vN(x,y) a via of type N, cw(c..) or ccw(c..) an arc to the next point about the centre after c; other vN are vias at no path point)
1V8: MOS.R.3.2 MOS.U.2.4 R23.2 REG.C.17.2 REG.C.18.2 U6.5 | length 38.5
  Top Layer w0.6: MOS.U.2.4 44.401,36.025 44.401,36.187 44.7,36.486 44.7,36.958 45.051,37.309 54.391,37.309 55.3,36.4 55.3,28.6 56.1,27.8 58.509,27.8 59.6,26.709 59.8,26.709 U6.5 U6.5@59.8,26.5 ; MOS.R.3.2 59.525,21 59.7,21.175 59.7,21.2 60.402,21.902 60.402,23.458 60.25,23.609 60.25,24.704 ; R23.2 R23.2@59.525,24.704 ; REG.C.17.2 REG.C.17.2@61.6,24.525 ; R23.2@59.525,24.704 60.25,24.704 ; R23.2@59.525,24.704 59.7,24.879 59.7,24.904 59.8,25.004 U6.5@59.8,26.5 ; U6.5@59.8,26.5 REG.C.18.2 62.2,26.475 62.025,26.3 62,26.3 61.6,25.9 REG.C.17.2@61.6,24.525 ; 60.25,24.704 61.396,24.704 61.4,24.7 61.425,24.7 REG.C.17.2@61.6,24.525
3V: C1.2 MOS.R.5.2 MOS.U.2.5 R1.2 R20.2 R21.2 REG.C.13.2 REG.C.14.2 REG.U.3.5 U1.2 VPC.CJ.8.1 VPC.R.16.2 VPC.R.17.2 VPC.R.18.2 | length 7.2
  Top Layer w0.6: C1.2 9.205,14.905 9.205,17.645 U1.2 ; R21.2 65.825,24.604 66,24.779 66,25.025 66.025,25.05 REG.U.3.5 68.35,26.45 REG.C.14.2
  Bottom Layer w0.6: MOS.U.2.5 MOS.U.2.5@46.179,36.025
ButtonLeftClick: U1.23 VPC.R.9.2
ButtonLittleFinger: LBS.C.21.2 LBS.R.12.2 U1.9
ButtonRightClick: U1.28 VPC.R.10.2 | length 0
  Top Layer w0.5: VPC.R.10.2@93.198,54 VPC.R.10.2@93.2,54.002
ButtonRingFinger: LBS.C.20.2 LBS.R.11.2 U1.10
ButtonScrollWheel: U1.31 VPC.R.8.2
C\S\: MOS.U.2.13 U1.18 | length 28
  Top Layer w0.4: U1.18 25.887,23.038 27.462,23.038 v2(27.5,23)
  Plane 2 w0.4: v2(27.5,23) 27.5,23.054 27.2,23.354 27.2,27.5 27.7,28 28.6,28 33.5,23.1 43.265,23.1 45.29,25.125 MOS.U.2.13
  Bottom Layer w0.4: MOS.U.2.13@45.29,24.99 MOS.U.2.13
CH_DIS: U1.12
CHG: U1.7 U5.3
D+: J7.6 J7.7 U1.14 USB.Z.1.1 | length 63
  Top Layer w0.3: USB.Z.1.1 63.3,39.2 63.3,39.6 63.5,39.8 67.3,39.8 69.738,37.362 J7.7 71.418,37.204 J7.6
  Top Layer w0.4: U1.14 24.45,17.35 25.762,16.038 25.862,16.038 v2(25.9,16) ; v2(61.959,39.151) USB.Z.1.1@63.249,39.151
  Plane 2 w0.4: v2(25.9,16) 44.552,16 54.6,26.048 54.6,31.792 v2(61.959,39.151)
D-: J7.5 J7.8 U1.13 USB.Z.1.3 | length 65.6
  Top Layer w0.3: USB.Z.1.3@63,37.2 63.424,37.2 63.499,37.125 63.499,36.701 63.722,36.478 70.986,36.478 J7.5@71.05,36.414 ; J7.5 J7.5@71.05,36.414 ; J7.8 72.063,37.837 72.5,37.4 72.5,36.6 72.1,36.2 71.683,36.2 71.541,36.341 71.123,36.341 J7.5@71.05,36.414
  Top Layer w0.4: U1.13 23.43,17.4 23.43,16.37 v2(24.4,15.4) ; v2(62,37.2) 62.05,37.25 USB.Z.1.3
  Plane 2 w0.4: v2(24.4,15.4) 24.427,15.373 44.673,15.373 55.3,26 55.3,30.5 v2(62,37.2)
GND: C1.1 C2.1 C3.1 C4.1 C5.1 C6.1 J1.2 J3.1 J4.5 J7.1 J7.12 LBS.C.20.1 LBS.C.21.1 LBS.SW.1.A LBS.SW.2.A MCU.D.1.2 MOS.C.10.1 MOS.C.11.1 MOS.U.2.8 R7.1 R13.1 R14.1 R19.1 R22.1 R24.1 REG.C.12.1 REG.C.13.1 REG.C.14.1 REG.C.16.1 REG.C.17.1 REG.C.18.1 REG.U.3.2 U1.1 U1.40 U1.41_1 U1.41_2 U1.41_3 U1.41_4 U1.41_5 U1.41_6 U1.41_7 U1.41_8 U1.41_9 U4.3 U4.4 U4.5 U5.5 U6.2 USB.C.19.1 USB.Z.1.2 VPC.CJ.1.1 VPC.CJ.5.1 VPC.CJ.9.1 VPC.Z.2.2 | length 8.9
  Top Layer w0.4: C1.1 7.625,14.9 7.9,15.175 7.9,15.2 7.94,15.24 U1.1 ; REG.C.16.1 58.72,31.08 58.72,30.58 58.9,30.4 58.9,29.25 58.854,29.204 U6.2 ; REG.C.12.1 64.82,30.98 64.82,30.48 65.1,30.2 65.1,29.175 REG.U.3.2
  Top Layer w0.55: USB.Z.1.2 v1(64.7,38.2)
  other v1: 37,4.5 8,6.5 50.7,38.7 38.5,38.8 52.8,40.7 54.2,43.7 54.7,47 35.7,50 53.8,50.4 37.6,53.1 51.6,53.3 48.6,55.2 40.6,55.3 44.6,56
LED: MCU.R.2.2 U1.17
MISO: MOS.R.5.1 MOS.U.2.12 U1.21 | length 24.5
  Top Layer w0.4: U1.21 25.717,27.017 27.982,27.017 v2(28,27)
  Plane 2 w0.4: v2(28,27) 28.6,27 33.2,22.4 44.343,22.4 47.068,25.125 MOS.U.2.12
MOSI: MOS.U.2.11 U1.19 | length 25.8
  Top Layer w0.4: U1.19 25.757,24.438 28.462,24.438 v2(28.5,24.4)
  Plane 2 w0.4: v2(28.5,24.4) 31.114,21.786 45.507,21.786 48.846,25.125 MOS.U.2.11
MOTION: MOS.U.2.9 U1.22 | length 36.2
  Top Layer w0.4: U1.22 26.973,28.305 27.268,28.6 v2(27.3,28.6)
  Plane 2 w0.4: v2(27.3,28.6) 26.6,27.9 26.6,23.013 28.83,20.783 48.06,20.783 52.402,25.125 MOS.U.2.9
NetC4_2: C4.2 R15.2 R19.2 U1.6
NetJ2_1: J2.1 U1.36 | length 4.6
  Top Layer w0.4: J2.1 9.743,37.757 10.769,37.757 12.502,36.025 12.502,35.934 12.736,35.7 12.77,35.7 13.02,35.45 U1.36
NetJ5_1: J5.1 R1.1 U1.3 | length 10.2
  Top Layer w0.4: U1.3 10.589,17.541 10.589,15.816 v2(10.628,15.778) 10.666,15.74 10.666,15.334 10.8,15.2 10.8,15.175 11.075,14.9 R1.1
  Plane 2 w0.4: J5.1 5.62,16.3 10.1,16.3 10.622,15.778 v2(10.628,15.778)
NetJ8_1: J8.1 U1.37 | length 5.7
  Top Layer w0.4: J8.1 8.998,36.202 11.055,36.202 11.232,36.025 11.232,35.934 11.466,35.7 11.5,35.7 11.75,35.45 U1.37
NetLBS.R.11_1: LBS.R.11.1 LBS.SW.1.B | length 2.6
  Top Layer w0.4: 38.7,10.2 40.276,10.2 LBS.SW.1.B
NetLBS.R.12_1: LBS.R.12.1 LBS.SW.2.B | length 0.9
  Top Layer w1: LBS.SW.2.B@10.9,11.8 LBS.SW.2.B
NetMCU.D.1_1: MCU.D.1.1 MCU.R.2.1
NetMOS.C.10_2: MOS.C.10.2 MOS.C.11.2 MOS.U.2.3 | length 0.1
  Top Layer w0.7: MOS.U.2.3 MOS.U.2.3@42.623,36.025
NetMOS.R.3_1: MOS.R.3.1 MOS.R.4.2 | length 2.1
  Top Layer w0.6: MOS.R.4.2 MOS.R.3.1
NetMOS.R.4_1: MOS.R.4.1 MOS.U.2.15 | length 14.8
  Top Layer w0.6: MOS.U.2.15@41.739,25.22 41.739,24.161 44.9,21 MOS.R.4.1
  Top Layer w1: MOS.U.2.15 MOS.U.2.15@41.739,25.22
NetR6_1: R6.1 R7.2 U1.11
NetR13_2: R13.2 U5.1 | length 2.6
  Top Layer w0.4: U5.1 9.55,48.979 10.075,49.504 R13.2
NetR14_2: R14.2 U5.4
NetR21_1: R21.1 R22.2 REG.U.3.4 | length 3.7
  Top Layer w0.6: REG.U.3.4 64.125,26.25 64.2,26.175 R21.1 R22.2
NetR23_1: R23.1 R24.2 U6.4 | length 3.6
  Top Layer w0.6: R24.2 R23.1 57.9,26.309 U6.4
NetVPC.CJ.2_1: VPC.CJ.2.1 VPC.R.8.1 VPC.R.18.1 VPC.Z.2.4 | length 0.9
  Top Layer w0.5: VPC.CJ.2.1@40.4,64.05 VPC.CJ.2.1
NetVPC.CJ.6_1: VPC.CJ.6.1 VPC.R.9.1 VPC.R.17.1 VPC.Z.2.1
NetVPC.CJ.7_1: VPC.CJ.7.1 VPC.R.10.1 VPC.R.16.1 VPC.Z.2.3 | length 0.9
  Top Layer w0.5: VPC.CJ.7.1@20.4,64.05 VPC.CJ.7.1
PWR_STAT: U1.4
PWR_STAT: R20.1 U4.1
R\E\S\E\T\: MOS.U.2.7 | length 0.1
  Plane 1 w0.6: MOS.U.2.7 MOS.U.2.7@49.735,36.025
SCLK: MOS.U.2.10 U1.20 | length 30.6
  Top Layer w0.4: U1.20 25.746,25.719 28.446,25.719 v2(28.484,25.681)
  Plane 2 w0.4: v2(28.484,25.681) 28.464,25.7 28.4,25.7 27.8,25.1 27.8,23.9 30.415,21.285 46.784,21.285 50.624,25.125 MOS.U.2.10
ScrollWheelOpto0: U1.29 VPC.CJ.3.1 VPC.Z.2.5
ScrollWheelOpto1: U1.30 VPC.CJ.4.1 VPC.Z.2.6 | length 1.9
  Top Layer w0.5: VPC.CJ.4.1 32.4,63.874 VPC.CJ.4.1@33,63.274
TCK: J4.1 U1.32 | length 9.4
  Top Layer w0.4: J4.1 12.59,41.13 12.59,39.334 14.72,37.205 16.402,37.205 17.582,36.025 17.582,35.934 17.816,35.7 17.85,35.7 18.1,35.45 U1.32
TDI: J4.3 U1.34 | length 12.6
  Top Layer w0.4: J4.3@7.44,41.133 J4.3 7.466,41.174 7.466,39.434 7.797,39.103 11.403,39.103 14.304,36.202 14.865,36.202 15.31,35.757 15.31,35.4 U1.34 U1.34@15.56,35.45
  Top Layer w0.6: J4.3@7.466,41.174 J4.3@7.708,40.932
TDO: J4.2 U1.33 | length 10.4
  Top Layer w0.4: J4.2 9.98,40.359 10.734,39.605 11.61,39.605 14.512,36.703 15.633,36.703 16.312,36.025 16.312,35.934 16.546,35.7 16.58,35.7 16.83,35.45 U1.33
  Top Layer w0.6: J4.2 J4.2@10.234,40.946
TMS: J4.4 U1.35 | length 14
  Top Layer w0.4: J4.4 5.031,41.069 5.031,39.369 5.798,38.602 11.195,38.602 13.772,36.025 13.772,35.934 14.006,35.7 14.04,35.7 14.29,35.45 U1.35
  Top Layer w0.6: J4.4@4.9,40.321 J4.4
V_BAT: C5.2 U4.6 | length 2.6
  Top Layer w0.4: U4.6 66.925,45.95 C5.2@67.375,45.5
  Top Layer w0.6: C5.2@67.375,45.5 C5.2
V_BAT: C2.2 J1.1 J6.1 R15.1 U5.2 | length 7.3
  Top Layer w0.4: J1.1 3.4,45.46 4.54,46.6 C2.2
  Top Layer w0.6: C2.2@7.6,46.55 7.625,46.55 7.975,46.2 U5.2
V_SYS: REG.C.12.2 REG.C.16.2 REG.U.3.1 REG.U.3.3 U4.7 U6.1 U6.3 | length 35.4
  Top Layer w0.4: U6.3 58,29.109 58,28.909 58.502,28.407 59.198,28.407 59.8,29.009 U6.1 59.8,31.025 60.075,31.3 REG.C.16.2 60.9,31.3 ; REG.U.3.3 64.125,28.95 64.726,28.348 65.423,28.348 66.025,28.95 REG.U.3.1 66.112,29.238 66.112,30.988 66.05,31.05 REG.C.12.2 66.175,31.2 65.9,31.475 65.9,31.5 64.9,32.5 61.9,32.5 61.9,31.9 61.3,31.3 60.9,31.3 ; U4.7 63.5,46.6 60.9,44 60.9,31.3
V_USB: C3.2 C6.2 J7.2 J7.11 R6.2 U4.8 U5.6 USB.C.19.2 USB.Z.1.4 USB.Z.1.5 | length 95.2
  Top Layer w0.4: U4.8 67.346,47.25 C6.2 67.425,47.304 67.7,47.029 67.7,47.004 68.177,46.528 69.972,46.528 70.3,46.2 70.3,41.206 72.129,39.378 J7.11 72.388,39.241 72.959,39.241 73.3,38.9 73.3,36.1 72,34.8 70.817,34.8 J7.2 66.15,34.873 ; USB.C.19.2 65.425,34.5 65.798,34.873 66.15,34.873 ; USB.Z.1.4 66.15,37.725 ; USB.Z.1.5 66.15,37.725 ; v2(66.2,35.5) 66.162,35.462 66.162,35.32 66.15,35.309 66.15,34.873 ; v2(67.6,37.6) 66.275,37.6 66.15,37.725
  Top Layer w0.6: U5.6 12.475,47.175 13.628,47.175 v2(13.972,47.519) ; v2(66,48.8) 67.2,47.6 67.2,47.479 67.375,47.304 C6.2
  Plane 2 w0.4: v2(66.2,35.5) 67.6,36.9 v2(67.6,37.6)
  Plane 2 w0.6: v2(13.972,47.519) 30.619,47.519 40.3,57.2 49.9,57.2 57.6,49.5 64.2,49.5 64.9,48.8 v2(66,48.8)
pads on no net: J7.3 J7.4 J7.9 J7.10 J7.19 LBS.SW.1. LBS.SW.2. MOS.U.2. MOS.U.2.1 MOS.U.2.2 MOS.U.2.6 MOS.U.2.14 MOS.U.2.16 U1.5 U1.8 U1.15 U1.16 U1.24 U1.25 U1.26 U1.27 U1.38 U1.39 U1.41_10 U1.41_11 U1.41_12 U1.41_13 U1.41_14 U1.41_15 U1.41_16 U1.41_17 U1.41_18 U1.41_19 U1.41_20 U1.41_21 U4.2 USB.Z.1.6

## Polygon pours and split planes (outlines as drawn)
GND on Plane 1 "Plane 1-GND" (solid, remove dead copper, shelved, pour order 16): -1,68 81,68 81,0 -1,0
GND on Plane 2 "Plane 2-GND" (solid, remove dead copper, shelved, pour order 2): -1,68 81,68 81,0 -1,0
GND on Bottom Layer "Bottom Layer-GND" (solid, remove dead copper, shelved, pour order 14): -1,68 81,68 81,0 -1,0
GND on Top Layer "Top Layer-GND" (solid, remove dead copper, shelved, pour order 12): -1,68 81,68 81,0 -1,0

## Silkscreen, mask and mechanical layers (free items; w line width, h text height)
Top Overlay:
  rectangle: 38.6,52.4 46.5,56.9
  rectangle: 1.2,56.4 46.4,62
  rectangle: -0.073,50.3 1.2,62
  rectangle: 46.35,54.65 46.391,61.991
  lines w0.254: -0.073,50.3 37.2,50.3 ; -0.073,61.991 46.391,61.991 46.5,61.882 46.5,55 46.5,54.8 46.2,54.5
  text "Support Keepout" at 1.7,52.289 h5
Mechanical 1:
  lines w0.1: 36.26,26.268 36.26,34.868 53.52,34.868 53.52,26.268 36.26,26.268
Board Outline:
  drawing of 349 lines, arcs and shapes, not listed

## Text inside footprints (layer, text, board x,y; h text height)
MOS.U.2: Top Overlay "Optic Side" at 34,26.2 h2 r90; Bottom Overlay "Sensor Side" at 54.217,26.125 h2 r270; Bottom Overlay "1" at 34.3,35.9 h4
U1: Mechanical 13 "ANTENNA" at 3.7,21.9 h1.27 r90